# EAGLE board IIC (EAGLE 9.7.0)

Size 319.62 x 143.84 mm. Coordinates in mm from the lower left corner, seen from the top.
Outline: 0,0 319.62,0 319.62,143.84 0,143.84 0,0
Copper layers (1*16): Top 0.035mm / dielectric 1.5mm / Bottom 0.035mm
Design rules "default": minimum track width 6mil, minimum drill 0.35mm, track to track 6mil, track to pad 6mil, pad to pad 6mil, via to via 6mil, smd to smd 6mil, copper to edge 40mil, drill to drill 6mil, minimum pad ring 10mil, minimum via ring 8mil, stop-mask expansion 4mil, vias tented up to drill 0mil, thermal gap 10mil

## Footprints (pad centres in the part's own frame; a part is rotated, then mirrored left to right if it is on the bottom)
LEDRD254W60D565H860B = drill 0.981 pad 1.581: 1 -1.27,0; 2 1.27,0
BATTERY-GENERIC = drill 1.118 pad 3.15 octagon: + 2.54,0; - -2.54,0
PIEZO = drill 1 pad 1.6: 1 -3.5,0; 2 3.5,0
RESAD1016W63L850D250B = drill 0.83 pad 1.43: 1 -5.08,0; 2 5.08,0
HA-06-SM065 = drill 1 pad 1.676: 1 -2.54,-2.54; 2 0,2.54; 3 2.54,-2.54
SWITCH-SPDT-PTH-8.5X3.7MM = drill 1.016 pad 1.88: 1 -2.54,0; 2 0,0; 3 2.54,0
ARDUINO-UNO-R3-SHIELD = drill 1.016 pad 1.88: 3.3V 24.13,-2.54; 5V 24.13,0; A0 24.13,12.7; A1 24.13,15.24; A2 24.13,17.78; A3 24.13,20.32; A4 24.13,22.86; A5 24.13,25.4; AREF -24.13,-13.97; D2 -24.13,20.32; D3 -24.13,17.78; D4 -24.13,15.24; D5 -24.13,12.7; D6 -24.13,10.16; D7 -24.13,7.62; D8 -24.13,3.81; D9 -24.13,1.27; D10 -24.13,-1.27; D11 -24.13,-3.81; D12 -24.13,-6.35; D13 -24.13,-8.89; GND@0 24.13,2.54; GND@1 24.13,5.08; GND@2 -24.13,-11.43; IOREF 24.13,-7.62; NC 24.13,-10.16; RES 24.13,-5.08; RX -24.13,25.4; SCL -24.13,-19.05; SDA -24.13,-16.51; TX -24.13,22.86; VIN 24.13,7.62
LCD-I2C = drill 1.016 long: 1 -19.05,-5.08; 2 -19.05,-7.62; 3 -19.05,-10.16; 4 -19.05,-12.7

## Placement (x,y rotation side)
D1  RED  [LEDRD254W60D565H860B]  100.04,137.78 270 top
P1  BATTERYGENERIC  [BATTERY-GENERIC]  37.74,119.82 180 top
P2  BATTERYGENERIC  [BATTERY-GENERIC]  8.26,120.02 180 top
P3  BATTERYGENERIC  [BATTERY-GENERIC]  68.09,119.89 180 top
PIEZO1  PIEZO  [PIEZO]  263.57,83.06 90 top
R1  65k  [RESAD1016W63L850D250B]  97.12,68.95 90 top
R2  220  [RESAD1016W63L850D250B]  255.19,81.74 0 top
R3  1M  [RESAD1016W63L850D250B]  102.2,79.11 0 top
R4  1M  [RESAD1016W63L850D250B]  107.28,71.49 270 top
RPOT1  1000k  [HA-06-SM065]  48.86,99.43 0 top
S1  TOGGLE  [SWITCH-SPDT-PTH-8.5X3.7MM]  38.7,99.43 0 top
U1  ARDUINO-UNO-R3-SHIELD  [ARDUINO-UNO-R3-SHIELD]  225.98,77.93 180 top
U3  LCD-16X2-I2CSUNFOUNDER-IIC  [LCD-I2C]  264,36.63 0 top

## Library data of the parts
D1 = Tinkercad; CATEGORY: Opto-Electronic; SUB-CATEGORY: LED; VALUE: LED_RED
P1-P3 PIEZO1 R1-R4 RPOT1 S1 U1 U3 = Tinkercad

## Nets
P1+: P1.+ P2.-
P2+: P2.+ S1.1
P3+: P1.- P3.+
P3-: D1.2 P3.- PIEZO1.2 R1.1 S1.3 U1.GND@0 U1.GND@1 U1.GND@2 U3.1
PIEZO1_1: D1.1 PIEZO1.1 R2.2
R3_2: R3.2 R4.1 RPOT1.2
S1_P: RPOT1.1 S1.2
U1_5V: R4.2 U1.5V U3.2
U1_A0: R1.2 R3.1 U1.A0
U1_A4: U1.A4 U3.3
U1_A5: U1.A5 U3.4
U1_D11: R2.1 U1.D11

## Tracks (layer width: path | path; a pad name or v marks a point on that pad's centre or on a via)
P1+  (1 unrouted)
P2+  (1 unrouted)
P3+  (1 unrouted)
P3-  (8 unrouted)
PIEZO1_1  (2 unrouted)
R3_2  (2 unrouted)
S1_P  (1 unrouted)
U1_5V  (2 unrouted)
U1_A0  (2 unrouted)
U1_A4  (1 unrouted)
U1_A5  (1 unrouted)
U1_D11  (1 unrouted)